# Altium PCB captivate_pgmr.PcbDoc (part 2 of 2)
Units mil, origin at the board's own origin, x right, y up, seen from the top; angles counter-clockwise.
Board outline 2200 x 2200 mil, 4 copper layers (Top Layer, Signal Layer 1, Signal Layer 2, Bottom Layer), stack 61.6 mil thick; 159 components, 109 nets, 528 pads, 147 vias.
Unrouted connection lines stored in the file: 5.
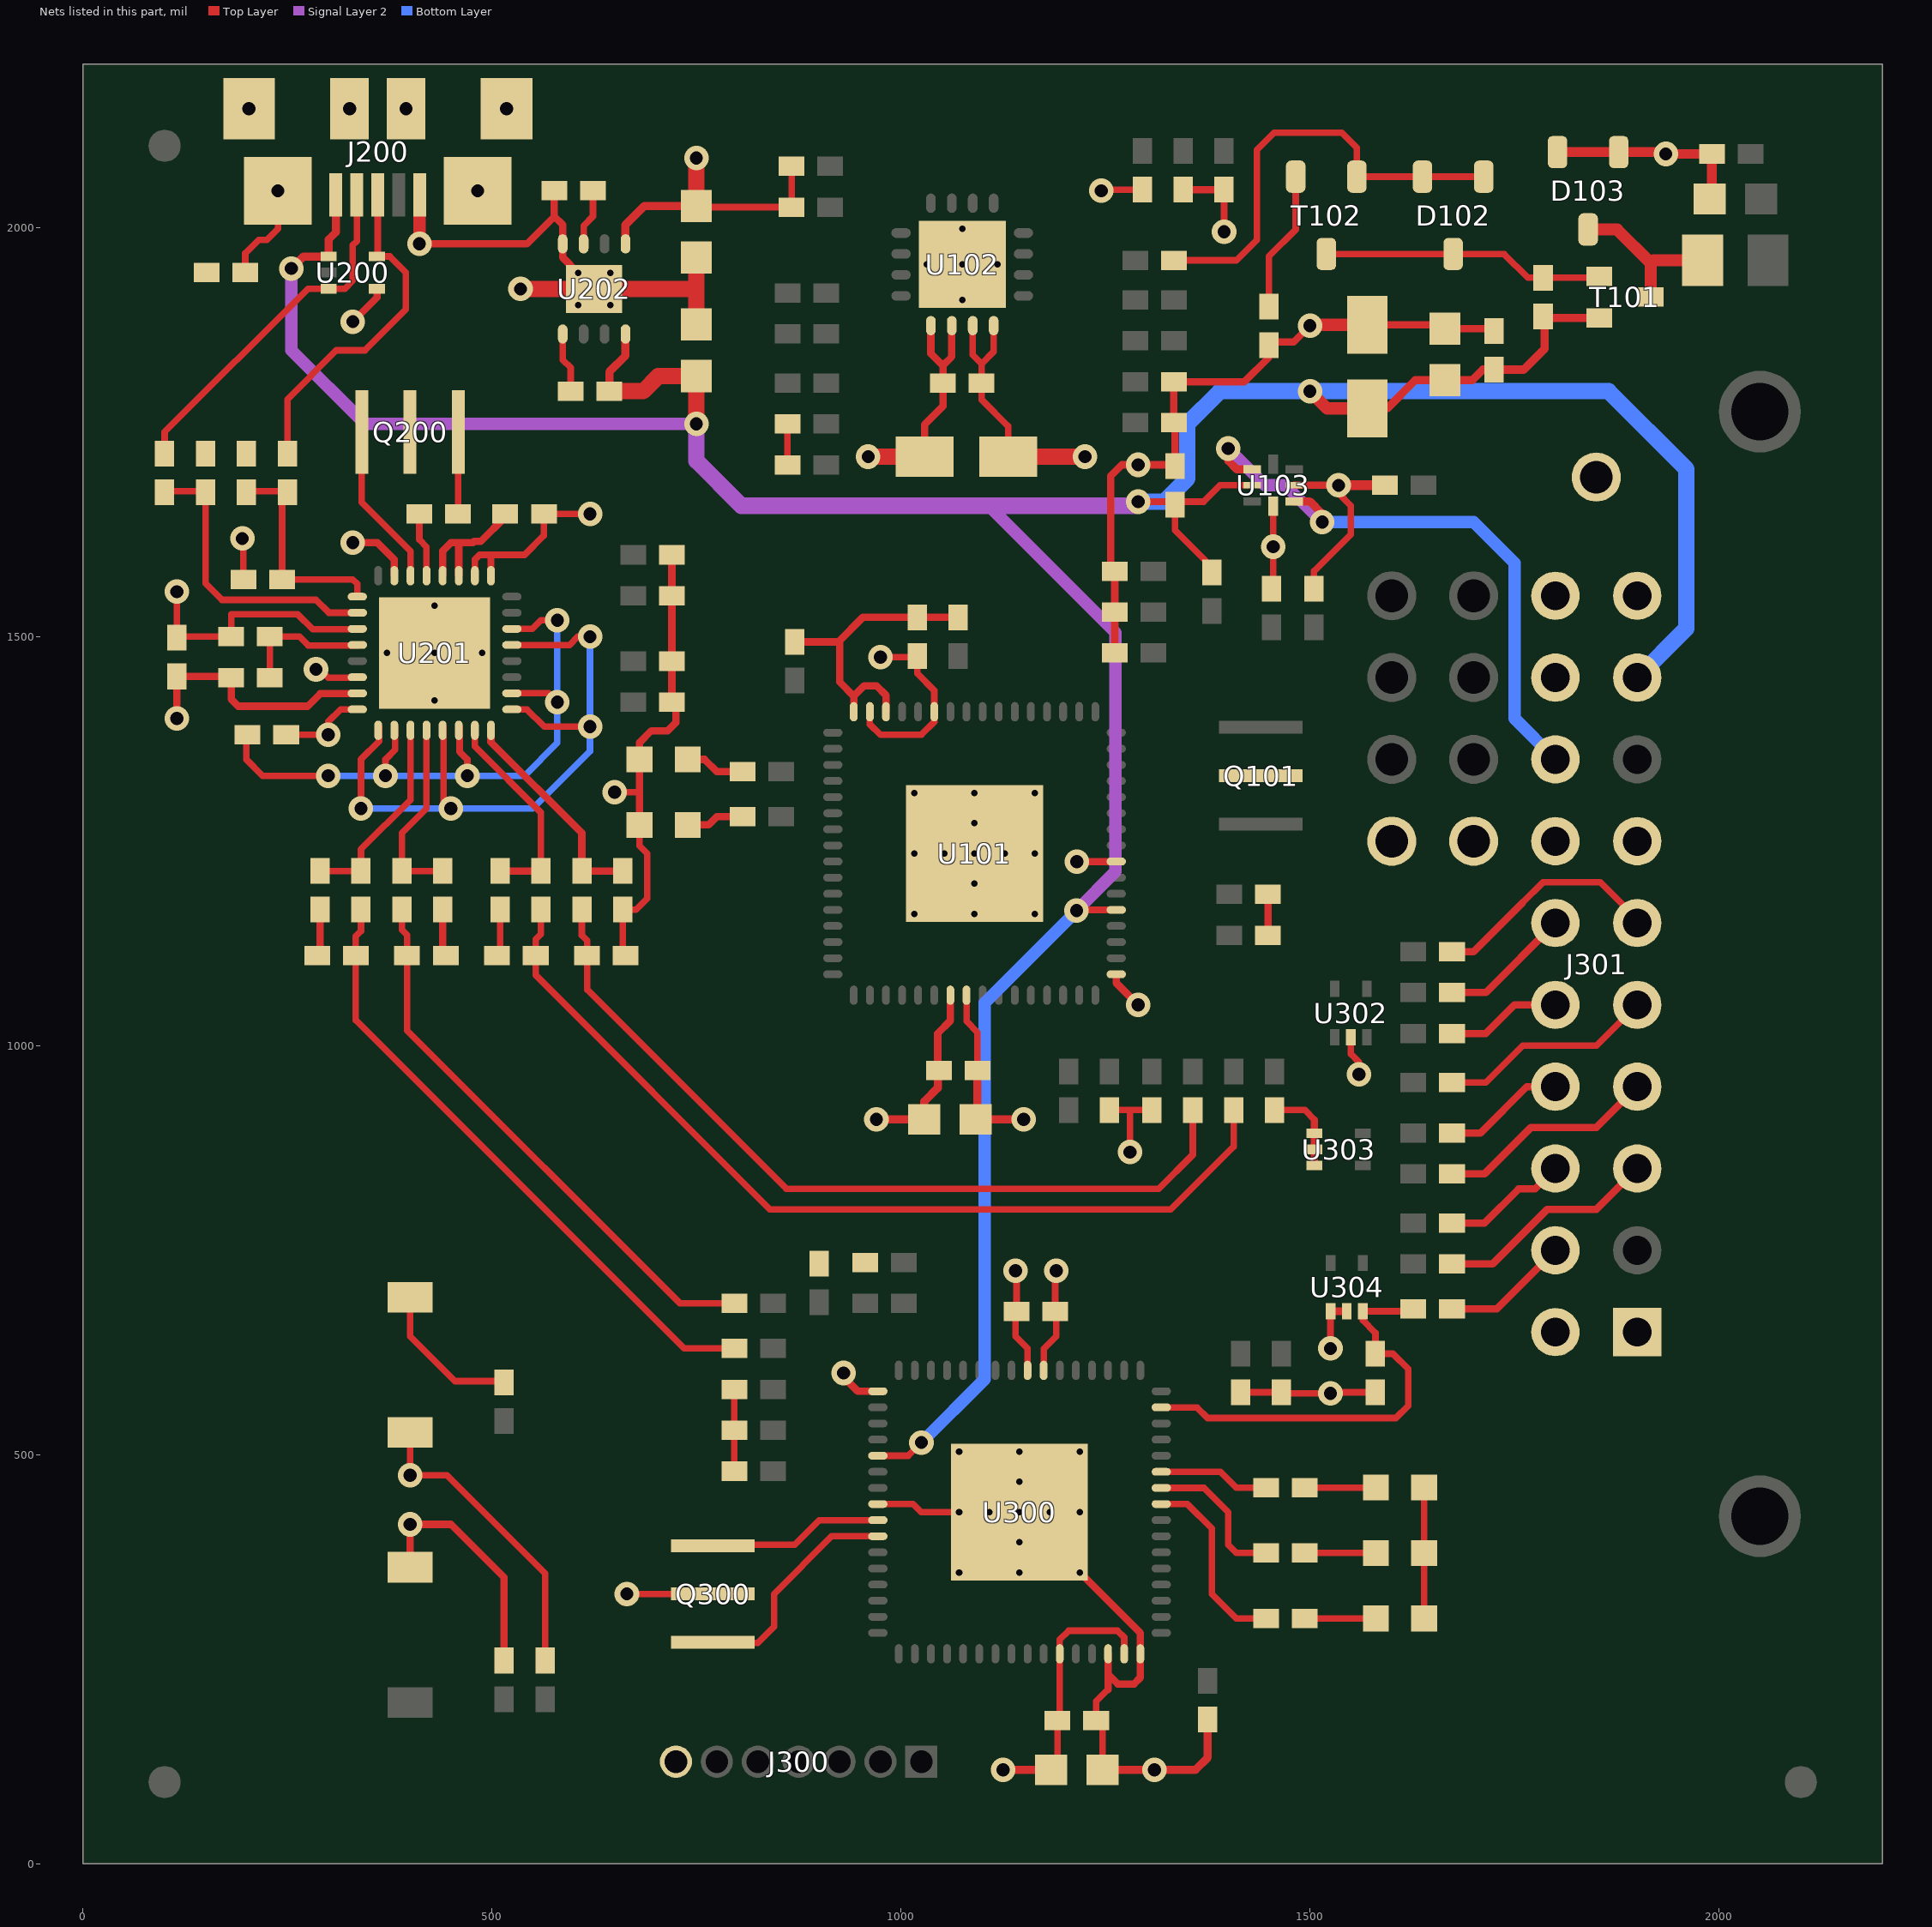
[diagram p4: the nets of this part, all layers, seen from the top]

## Via types
v1: diameter 30, hole 16, Top Layer to Bottom Layer, tented both sides, 107 vias
v2: diameter 19.68, hole 7.87, Top Layer to Bottom Layer, 40 vias

## Nets (pads, with @x,y where several pads share a name; then routed paths per layer and width w, separated by ;. In a path a pad name is that pad's centre, name@x,y a point inside that pad or via, vN(x,y) a via of type N, cw(c..) or ccw(c..) an arc to the next point about the centre after c; other vN are vias at no path point) (continued)
GND: C101.2 C102.2 C103.2 C104.2 C106.2 C107.2 C109.2 C110.2 C111.2 C112.2 C113.2 C115.2 C116.2 C117.2 C118.2 C119.2 C120.2 C121.2 C122.2 C123.2 C124.2 C125.2 C200.2 C201.2 C204.2 C205.2 C206.2 C207.2 C208.2 C209.2 C210.2 C211.2 C212.2 C213.2 C300.2 C303.2 C304.2 C305.2 C306.2 C307.2 C308.2 C309.2 C310.2 D103.1 D103.2 D300.2 D301.2 D302.2 GND.1 J200.5 J300.7 J301.1 J301.2 J301.13 J301.14 J301.19 J301.20 LED101.2 LED102.2 Q101.2 Q200.2 Q300.2 R106.2 R107.1 R108.1 R113.1 R115.1 R119.2 R122.1 R125.1 R200.2 R207.1 R208.1 R212.1 R213.1 R215.1 R217.1 R218.1 R219.1 R307.1 S300.1 TP8.1 U101.14 U101.16 U101.39 U101.49 U101.56 U101.65 U102.13 U102.14 U102.17 U103.6 U200.4 U201.7 U201.27 U201.28 U201.31 U202.4 U202.9 U300.14 U300.16 U300.39 U300.49 U300.56 U300.65 U302.2 U303.1 U303.2 U303.3 U304.1 U304.2 | length 6602
  Top Layer w8: R213.1@506.38,1110 510,1113.62 C207.2@510,1166.38 ; v1(650,1310) 680.47,1310 ; R212.1@663.62,1110 660,1113.62 C206.2@660,1166.38 676.38,1166.38 690,1180 690,1235 680.47,1244.53 LED102.2@680.47,1270 ; v1(665,330) 675,330 715,330 Q300.2@790,330 ; C309.2@796.38,480 C308.2@796.38,530 C304.2@796.38,580 ; C122.2@861.38,1710 R122.1@861.38,1760 ; U300.56@971.77,439.84 1015,439.84 1024.84,430 1025,430 v2(1145,430) ; U300.39@1174.53,603.23 1174.53,629.53 1190,645 1190,673.62 C305.2@1188.62,675 1188.62,723.62 v1(1190,725) ; C306.2@1246.5,115 1246.5,167.13 C307.2@1238.62,175 1238.62,198.62 1253.27,213.27 ; C110.2@1255,921.38 1280,921.38 ; v1(1280,870) 1280,921.38 ; R106.2@1306.79,921.38 1280,921.38 ; v1(1395,1995) C116.2@1395,2046.38 ; C111.2@1456.79,921.38 1493.62,921.38 1505.47,909.53 ; C112.2@1505,1558.62 1505,1580 1550,1625 1550,1660 1535,1675 v1(1535,1685) ; v1(1525,630) 1525,675.15 U304.1@1525.32,675.47 ; U302.2@1550,1010.47 1550,990 1560,980 v1(1560,965) ; D300.2@1639.53,300 D301.2@1639.53,380 D302.2@1639.53,460
  Top Layer w9: v1(115,1400) C209.2@115,1451.38 C208.2@180,1451.38 ; C208.2@181.38,1450 181.38,1423.62 190,1415 275,1415 290.28,1430.28 U201.7@336.61,1430.28 ; R208.1@286.38,1110 290,1113.62 C205.2@290,1166.38 ; v1(330,1615) 360,1615 380.79,1594.21 U201.31@380.79,1574.49 ; v1(330,1885) 359.53,1914.53 U200.4@359.53,1925.31 ; S300.1@400.94,363.62 S300.1@400,362.68 v1(400,415) 450,415 515,350 C300.2@515,248.62 ; v1(411.42,1980.32) 542.76,1980 576.38,2013.62 ; U201.28@439.84,1574.49 439.84,1604.84 450,1615 460,1615 ; C204.2@440,1166.38 440,1113.62 R207.1@443.62,1110 ; U201.27@459.53,1574.49 459.53,1614.53 460,1615 ; C210.2@516.38,1650 516.38,1646.38 486.37,1616.37 478.22,1616.37 476.84,1615 460,1615 ; C211.2@576.38,2045 576.38,2013.62 ; U202.9@625,1925 v2(605.32,1944.69) 586.61,1963.39 586.61,2003.39 576.38,2013.62 ; v1@663.62,328.62 v1(665,330) ; v1@673.62,328.62 v1@675,330 ; LED102.2@680.47,1270 680.47,1310 LED101.2@680.47,1350 680.47,1370.47 695,1385 715,1385 725,1395 725,1415 R215.1@720,1420 R217.1@720,1470 R218.1@720,1550 R219.1@720,1600 ; C101.2@870,1493.62 923.62,1493.62 ; v1(930,600) 930,595 947.33,577.67 U300.49@971.77,577.68 ; U101.16@942.36,1408.23 942.36,1427.36 ; U101.14@981.73,1408.23 981.73,1428.27 970,1440 955,1440 942.36,1427.36 ; C106.2@1028.82,1720 1028.82,1759.09 1051.38,1781.65 C124.2@1051.38,1810 1051.38,1831.38 ; U102.13@1036.61,1880.2 1036.61,1846.14 1051.38,1831.38 ; C103.2@1045,971.38 1045,1015 1060.47,1030.47 U101.39@1060.47,1061.77 ; U102.14@1062.2,1880.2 1062.2,1842.2 1051.38,1831.38 ; C121.2@1070,1523.62 C113.2@1020,1523.62 953.62,1523.62 923.62,1493.62 ; v2(1145,430) 1292.64,282.36 1292.64,227.64 1285,220 1265,220 1255,230 1253.27,230 ; v1(1215,1225) 1215.15,1225.15 U101.56@1263.23,1225.15 ; 1253.27,213.27 1253.27,230 ; U300.14@1253.27,256.77 1253.27,230 ; R125.1@1261.38,1480 C123.2@1261.38,1530 R107.1@1261.38,1580 1256.38,1585 1256.38,1696.38 1270,1710 1333.62,1710 C125.2@1335,1708.62 1335,1760.28 R113.1@1333.62,1761.65 C115.2@1333.62,1811.65 1420,1811.65 1450,1841.65 R119.2@1450,1856.38 1453.62,1860 1480,1860 v1(1500,1880) ; U101.49@1263.23,1087.32 1263.23,1076.77 v1(1290,1050) ; R106.2@1305.41,920 R106.2@1306.79,921.38 ; R115.1@1345,2046.38 C116.2@1395,2046.38 ; C107.2@1448.62,1135 C102.2@1448.62,1185 ; U103.6@1480.59,1685 v1(1535,1685) ; U303.3@1505.47,853.66 U303.2@1505.47,873.35 U303.1@1505.47,893.03 1505.47,909.53 ; U304.1@1525.32,675.47 U304.2@1545.01,675.47 ; C109.2@1570,1881.18 1660.31,1881.18 C117.2@1665,1876.5 1722.13,1876.5 C118.2@1725,1873.62 ; 923.62,1493.62 925,1492.24 925,1444.72 942.36,1427.36
  Top Layer w10: v1(970,910) C104.2@1028.5,910 1028.5,931.85 1045,948.35 C103.2@1045,971.38 ; C306.2@1246.5,115 v1(1310,115) 1360,115 1375,130 C310.2@1375,176.38
  Top Layer w12: v1(1535,1685) R108.1@1591.38,1685 ; D103.2@1802.6,2092.24 D103.1@1877.4,2092.24 1932.76,2092.24 v1(1935,2090) C120.2@1991.38,2090 1991.38,2037.87 C119.2@1988.5,2035
  Top Layer w15: v1@411.73,1980 J200.5@411.73,2044.69 ; v1(1500,1880) 1501.18,1881.18 C109.2@1570,1881.18
  Top Layer w20: v1(535,1925) U202.9@625,1925 750,1925 ; C212.2@750,1881.5 750,1925 ; C213.2@750,1963.5 750,1925 ; v1(960,1720) C106.2@1028.82,1720
  other v1: 1290,1710
  other v2: 1071.18,356.18 1145,356.18 1218.82,356.18 1145,393.09 1071.18,430 1108.09,430 1181.91,430 1218.82,430 1145,466.91 1071.18,503.82 1145,503.82 1218.82,503.82 1016.18,1161.18 1090,1161.18 1163.82,1161.18 1090,1198.09 1016.18,1235 1053.09,1235 1090,1235 1126.91,1235 1163.82,1235 1090,1271.91 1016.18,1308.82 1090,1308.82 1163.82,1308.82 605.32,1905.31 644.68,1905.31 1075,1911.69 644.68,1944.69 1031.69,1955 1075,1955 1118.31,1955 1075,1998.31
HUB_DM1: R204.1 R208.2 R305.1 | length 766.7
  Top Layer w8: R204.1@340,1166.38 340,1140 333.62,1133.62 R208.2@333.62,1110 333.62,1031.38 735,630 R305.1@796.38,630
HUB_DM2: R103.1 R209.1 R213.2 | length 1130.8
  Top Layer w8: R209.1@560,1166.38 560,1136.65 553.62,1130.28 R213.2@553.62,1110 553.62,1086.38 840,800 1330,800 1406.79,876.79 R103.1@1406.79,921.38
HUB_DP1: R205.1 R207.2 R306.1 | length 688.6
  Top Layer w8: R205.1@390,1166.38 390,1141.65 396.38,1135.28 R207.2@396.38,1110 396.38,1018.62 730,685 R306.1@796.38,685
HUB_DP2: R104.1 R211.1 R212.2 | length 1013.6
  Top Layer w8: R211.1@610,1166.38 610,1135 616.38,1128.62 R212.2@616.38,1110 616.38,1068.62 860,825 1315,825 1356.79,866.79 R104.1@1356.79,921.38
LED3: R300.2 U300.25 | length 233.1
  Top Layer w8: U300.25@1318.23,439.84 1349.85,439.84 1350,440 1380,410 1380,330 1410,300 R300.2@1446.38,300
LED4: R301.2 U300.26 | length 184.5
  Top Layer w8: U300.26@1318.23,459.53 1370.47,459.53 1400,430 1400,390 1410,380 R301.2@1446.38,380
LED5: R320.2 U300.27 | length 136.1
  Top Layer w8: U300.27@1318.23,479.22 1390.77,479.22 1410,460 R320.2@1446.38,460
MCU_IRQ: R308.1 R319.1 U300.31 U304.3 | length 527.1
  Top Layer w8: U300.31@1318.23,557.99 1362.02,557.99 1375,545 1605,545 1620,560 1620,605 1601.38,623.62 R308.1@1580,623.62 1580,649.21 1564.69,664.52 U304.3@1564.69,675.47 1623.5,675.47 R319.1@1626.38,678.35
NetC200_1: C200.1 R201.1 R202.2 U201.1 | length 270
  Top Layer w8: C200.1@200,1677.62 250,1677.62 243.62,1671.24 R201.1@243.62,1570 330,1570 335.51,1564.49 U201.1@335.51,1548.9
NetC201_1: C201.1 R203.2 U201.2 | length 361.7
  Top Layer w8: R203.2@100,1677.62 C201.1@150,1677.62 ; C201.1@150,1676.38 150,1565 170,1545 285,1545 300.79,1529.21 U201.2@335.51,1529.21
NetC204_1: C204.1 R205.2 U201.12 | length 234.4
  Top Layer w8: U201.12@420.16,1385.51 420.16,1290.16 390,1260 R205.2@390,1213.62 C204.1@440,1213.62
NetC205_1: C205.1 R204.2 U201.11 | length 246.9
  Top Layer w8: C205.1@290,1213.62 R204.2@340,1213.62 340,1240 400.47,1300.47 U201.11@400.47,1385.51
NetC206_1: C206.1 R211.2 U201.16 | length 267.9
  Top Layer w9: U201.16@498.9,1385.51 498.9,1371.1 610,1260 R211.2@610,1213.62 C206.1@660,1213.62
NetC207_1: C207.1 R209.2 U201.15 | length 255.4
  Top Layer w8: U201.15@479.21,1385.51 479.21,1365.79 560,1285 R209.2@560,1213.62
  Top Layer w9: C207.1@510,1213.62 R209.2@560,1213.62
NetC208_1: C208.1 R214.1 U201.4 | length 162.4
  Top Layer w8: C208.1@228.62,1450 R214.1@228.62,1500 265,1500 275.67,1489.33 U201.4@336.61,1489.33
NetC211_1: C211.1 U202.3 | length 69.6
  Top Layer w8: U202.3@612.2,1980.12 612.2,2002.2 623.62,2013.62 C211.1@623.62,2045
NetD102_1: D102.1 D102.2 R118.1 T102.1 | length 550.8
  Top Layer w8: R118.1@1333.62,1960 1410,1960 1435,1985 1435,2095 1456,2116 1539,2116 1557.4,2097.6 T102.1@1557.4,2062.24 D102.2@1637.6,2062.24 D102.1@1712.4,2062.24
NetD102_3: D102.3 R120.2 T101.1 T102.3 | length 343.6
  Top Layer w8: T102.3@1520,1967.76 1737.24,1967.76 1766.38,1938.62 R120.2@1785,1938.62 T101.1@1851.54,1938.62
NetD103_3: D103.3 L101.1 T101.3 | length 200
  Top Layer w15: D103.3@1840,1997.76 1875.24,1997.76 1916.5,1956.5 ; T101.3@1916.5,1915 1916.5,1956.5 ; L101.1@1980,1960 1920,1960 1916.5,1956.5
NetD300_1: D300.1 R300.1 | length 81.8
  Top Layer w8: R300.1@1498.63,300 D300.1@1580.48,300
NetD301_1: D301.1 R301.1 | length 86.9
  Top Layer w8: R301.1@1493.62,380 D301.1@1580.48,380
NetD302_1: D302.1 R320.1 | length 86.9
  Top Layer w8: R320.1@1493.63,460 D302.1@1580.48,460
NetJ200_2: J200.2 R203.1 U200.3 | length 444.7
  Top Layer w8: R203.1@100,1723.62 100,1750 275.31,1925.31 U200.3@300.47,1925.31 320.31,1925.31 330,1935 330,1978.46 334.96,1983.42 J200.2@334.96,2044.69
NetJ200_3: J200.3 R202.1 U200.5 | length 426
  Top Layer w8: R202.1@250,1723.62 250,1790 310,1850 345,1850 395,1900 395,1945 375.32,1964.68 U200.5@359.53,1964.68 360.55,1965.71 J200.3@360.55,2044.69
NetJ301_4: J301.4 R319.2 | length 156.1
  Top Layer w9: R319.2@1673.62,678.35 1728.35,678.35 J301.4@1800,750
NetJ301_5: J301.5 R317.1 | length 274.7
  Top Layer w9: R317.1@1673.62,733.35 1723.35,733.35 1790,800 1850,800 J301.5@1900,850
NetJ301_6: J301.6 R318.2 | length 159
  Top Layer w9: R318.2@1673.62,783.35 1713.35,783.35 1755,825 1775,825 J301.6@1800,850 J301.6@1805,850
NetJ301_7: J301.7 R316.1 | length 270.6
  Top Layer w9: R316.1@1673.62,843.35 1713.35,843.35 1770,900 1850,900 J301.7@1900,950
NetJ301_8: J301.8 R315.2 | length 149.8
  Top Layer w9: R315.2@1673.62,893.35 1708.35,893.35 1765,950 J301.8@1800,950
NetJ301_9: J301.9 R314.1 | length 265.7
  Top Layer w8: R314.1@1673.62,955 1715,955 1760,1000 1850,1000 J301.9@1900,1050
NetJ301_10: J301.10 R313.2 | length 140.9
  Top Layer w9: R313.2@1673.62,1015 1715,1015 1750,1050 J301.10@1800,1050
NetJ301_11: J301.11 R312.1 | length 285.2
  Top Layer w8: 1760,1175 1785,1200 1855,1200 1900,1155 J301.11@1900,1150
  Top Layer w9: R312.1@1673.62,1115 1700,1115 1760,1175
NetJ301_12: J301.12 R311.2 | length 161.6
  Top Layer w9: R311.2@1673.62,1065 1715,1065 J301.12@1800,1150
NetLED101_1: LED101.1 R101.1 | length 73.1
  Top Layer w9: LED101.1@739.53,1350 760,1350 775,1335 R101.1@806.38,1335
NetLED102_1: LED102.1 R102.1 | length 71
  Top Layer w9: LED102.1@739.53,1270 765,1270 775,1280 R102.1@806.38,1280
NetQ200_1: Q200.1 U201.30 | length 205.2
  Top Layer w8: Q200.1@340.95,1755 340.95,1664.05 400.47,1604.53 U201.30@400.47,1574.49
NetQ200_3: Q200.3 R210.1 | length 105.2
  Top Layer w8: R210.1@458.62,1650 458.62,1754.57 Q200.3@459.06,1755
NetQ300_1: Q300.1 U300.57 | length 194.7
  Top Layer w8: Q300.1@790,389.05 790.95,390 870,390 900.15,420.15 U300.57@971.77,420.16
NetQ300_3: Q300.3 U300.58 | length 279.6
  Top Layer w8: Q300.3@770,270.94 770.94,270 825,270 845,290 845,330 915.46,400.46 U300.58@971.77,400.47
NetR119_1: R119.1 T102.2 | length 172.1
  Top Layer w8: R119.1@1450,1903.62 1450,1965 1482.6,1997.6 T102.2@1482.6,2062.24
NetR210_2: R210.2 U201.29 | length 79.1
  Top Layer w8: R210.2@411.38,1650 411.38,1618.62 420.16,1609.84 U201.29@420.16,1574.49
NetR216_2: R216.2 U202.5 | length 73.9
  Top Layer w8: U202.5@586.61,1869.88 586.61,1838.39 596.38,1828.62 R216.2@596.38,1800
NetR304_2: R304.2 S301.1 | length 186
  Top Layer w8: S301.1@400,692.68 400,645 455,590 513.62,590 R304.2@515,588.62
OVRCUR: R206.2 U201.10 U201.14 U201.18 U201.22 | length 818.8
  Top Layer w8: R206.2@201.38,1380 200,1378.62 200,1350 220,1330 v1(300,1330) ; v1(370,1330) 370,1350 381.89,1361.89 U201.10@381.89,1390 ; U201.14@460.63,1390 460.63,1359.37 470,1350 v1(470,1330) ; U201.18@524.49,1430.79 569.21,1430.79 ; U201.22@524.49,1509.53 549.53,1509.53 560,1520 v1(580,1520)
  Bottom Layer w8: v1(300,1330) v1(370,1330) v1(470,1330) 540,1330 580,1370 v1(580,1520)
  other v1: 580,1420
POWERON: U201.9 U201.13 U201.17 U201.21 | length 860.9
  Top Layer w8: v1(340,1290) 340,1350 362.2,1372.2 U201.9@362.2,1390 ; U201.13@440.94,1390 440.94,1299.06 v1(450,1290) ; U201.17@524.49,1411.1 542.85,1411.1 563.95,1390 v1(620,1390) ; U201.21@524.49,1489.84 594.84,1489.84 v1@605,1500
  Bottom Layer w8: v1@330,1290 v1(340,1290) v1(450,1290) 550,1290 620,1360 v1(620,1390) v1(620,1500)
THERMAL: U201.33
  other v2: 430,1421.93 371.93,1480 430,1480 488.07,1480 430,1538.07
USB_SHIELD: J200.6 J200.7 J200.8 J200.9 J200.10 J200.11 R200.1 | length 164.7
  Top Layer w8: R200.1@198.62,1945 198.62,1968.62 215,1985 225,1985 238.5,1998.5 v1(238.5,2044.92) ; J200.11@201.82,2028.64 201.82,2031.97 220.86,2031.97 J200.11@235,2046.1
  other v1: 482.6,2044.92 203.07,2145.31 326.1,2145.31 395,2145.31 518.03,2145.31
VCC_5V: C109.1 C117.1 C118.1 C125.1 C212.1 J200.1 J301.17 R120.1 R124.2 R216.1 T101.2 U101.53 U103.2 U200.1 U202.8 U300.53 | length 4809.5
  Top Layer w8: U300.53@971.77,498.91 1008.91,498.91 v1(1025,515) ; v1(1214.68,1165.32) 1215.45,1166.08 U101.53@1263.23,1166.09 ; v1(1290,1665) 1331.38,1665 C125.1@1335,1661.38 ; R124.2@1380,1578.62 1380,1585 1335,1630 C125.1@1335,1661.38 ; U103.2@1429.41,1685 1390,1685 1370,1665 1338.62,1665 C125.1@1335,1661.38
  Top Layer w10: v1(255,1950) 269.68,1964.68 U200.1@300.47,1964.68 300.47,1985.47 309.37,1994.37 J200.1@309.37,2044.69 ; R216.1@643.62,1800 643.62,1823.62 663.39,1843.39 U202.8@663.39,1869.88 ; C109.1@1570,1778.82 1594.09,1778.82 1628.78,1813.5 C117.1@1665,1813.5 1698.5,1813.5 1711.38,1826.38 1761.38,1826.38 1786.97,1851.97 1786.97,1889.41 T101.2@1853.5,1889.41
  Top Layer w15: v1(1500,1800) 1521.18,1778.82 C109.1@1570,1778.82
  Top Layer w20: R216.1@643.62,1800 685,1800 703.5,1818.5 C212.1@750,1818.5 v1(750,1760)
  Signal Layer 2 w15: v1(255,1950) 255,1850 345,1760 v1(750,1760) ; 1110,1660 1110,1657.28 1262.28,1505 1262.28,1212.91 v1(1214.68,1165.32)
  Signal Layer 2 w20: v1(750,1760) 750,1715 805,1660 1110,1660 1285,1660 v1(1290,1665)
  Bottom Layer w15: v1(1025,515) 1102.42,592.42 1102.42,1052.42 1214.68,1164.68 v1(1214.68,1165.32)
  Bottom Layer w20: v1(1290,1665) 1321.81,1665 1350,1693.19 1350,1760 1390,1800 v1(1500,1800) 1865,1800 1960,1705 1960,1510 J301.17@1900,1450
VCC_LDO: C103.1 C104.1 C106.1 C113.1 C124.1 C209.1 C210.1 C213.1 C305.1 C306.1 C307.1 J301.18 R109.2 R114.2 R116.2 R117.2 R201.2 R206.1 R214.2 R302.2 R308.2 R309.2 R310.1 S301.2 TP7.1 U101.11 U101.15 U101.40 U102.15 U102.16 U103.4 U201.3 U201.6 U201.8 U201.25 U201.26 U202.1 U300.11 U300.15 U300.40 | length 3028.1
  Top Layer w8: C209.1@115,1498.62 v1(115,1555) ; C209.1@116.38,1500 R214.2@181.38,1500 181.38,1527.5 262.5,1527.5 280.98,1509.02 U201.3@336.61,1509.02 ; v1(195,1620) 196.38,1618.62 R201.2@196.38,1570 ; R206.1@248.62,1380 v1(300,1380) 300,1396.1 315,1411.1 U201.8@335.51,1411.1 ; v1(285,1460) 290,1460 300,1450 335.04,1450 U201.6@335.51,1450.47 ; S301.2@400,527.32 v1(400,475) 445,475 565,355 R302.2@565,248.62 ; U201.26@479.21,1574.49 479.21,1594.21 485,1600 500,1600 ; U201.25@498.9,1574.49 498.9,1598.9 500,1600 ; v1(620,1650) C210.1@563.62,1650 563.62,1623.62 540,1600 500,1600 ; C213.1@750,2026.5 751.5,2025 R116.2@866.38,2025 R117.2@866.38,2075 ; U101.15@962.05,1408.23 962.05,1392.95 975,1380 1025,1380 1040.79,1395.79 1040.79,1434.21 1020,1455 C113.1@1020,1476.38 1018.62,1475 v1(975,1475) ; U101.40@1080.16,1061.77 1080.16,1029.84 1093.62,1016.38 C103.1@1093.62,970 ; U102.15@1087.8,1880.2 1087.8,1844.45 1098.62,1833.62 ; C104.1@1091.5,910 C104.1@1093.62,912.13 ; U102.16@1113.39,1880.2 1113.39,1848.39 1098.62,1833.62 ; C106.1@1131.18,1720 1131.18,1757.16 1098.62,1789.72 C124.1@1098.62,1810 1098.62,1833.62 ; v1(1140,725) 1141.38,723.62 C305.1@1141.38,675 1140,673.62 1140,645 1154.84,630.16 U300.40@1154.84,603.23 ; C306.1@1183.5,115 1191.38,122.87 C307.1@1191.38,175 1194.21,177.83 U300.11@1194.21,256.77 1194.21,274.21 1205,285 1265,285 1272.95,277.05 U300.15@1272.95,256.77 ; v1(1245,2045) 1246.38,2046.38 R114.2@1295,2046.38 ; R309.2@1415,576.38 R310.1@1465,576.38 1466.38,575 v1(1525,575) ; R109.2@1453.21,1558.62 1455,1560.41 v1(1455,1610) U103.4@1455,1659.41 ; v1@1526.38,576.38 R308.2@1580,576.38
  Top Layer w10: U202.1@663.39,1980.12 663.39,2003.39 686.5,2026.5 C213.1@750,2026.5 ; C104.1@1091.5,910 v1(1150,910) ; C104.1@1093.62,912.13 C103.1@1093.62,970 ; v1(1125,115) C306.1@1183.5,115 ; v1(1525,575) v1@1526.38,576.38
  Top Layer w20: C213.1@750,2026.5 v1(750,2085) ; C106.1@1131.18,1720 v1(1225,1720)
VCC_METERED: J301.16 U103.1 U103.5 | length 768.1
  Top Layer w10: v1(1400,1730) 1400,1715 1410.31,1704.69 U103.1@1429.41,1704.69 ; U103.5@1480.59,1665.32 1499.68,1665.32 1515,1650 v1(1515,1640)
  Signal Layer 2 w15: v1(1400,1730) 1445,1685 1470,1685 v1(1515,1640)
  Bottom Layer w15: v1(1515,1640) 1700,1640 1750,1590 1750,1400 J301.16@1800,1350
pads on no net: FID1.1 FID2.1 FID3.1 H1.0 H2.0 H3.0 H4.0 J200.4 J301.3 J301.15 U101.3 U101.4 U101.10 U101.12 U101.13 U101.18 U101.19 U101.22 U101.23 U101.24 U101.25 U101.29 U101.30 U101.31 U101.32 U101.33 U101.36 U101.41 U101.42 U101.45 U101.46 U101.47 U101.48 U200.2 U201.5 U201.32 U202.2 U202.6 U202.7 U300.1 U300.2 U300.3 U300.4 U300.5 U300.6 U300.7 U300.8 U300.9 U300.10 U300.12 U300.13 U300.18 U300.19 U300.20 U300.21 U300.22 U300.23 U300.24 U300.28 U300.29 U300.30 U300.32 U300.33 U300.36 U300.41 U300.42 U300.43 U300.44 U300.45 U300.46 U300.47 U300.48

## Polygon pours and split planes (outlines as drawn)
VCC_LDO on Signal Layer 2 "Signal Layer 1-No Net" (solid, remove dead copper, pour order 6): 0,2200 2200,2200 2200,-50 0,-50 0,2200
GND on Bottom Layer "Bottom Layer-No Net" (solid, remove dead copper, pour order 5): 0,2200 0,0 2200,0 2200,2200 0,2200
GND on Top Layer "Top Layer-No Net" (solid, remove dead copper, pour order 4): 0,2200 2200,2200 2200,0 0,0 0,2200
GND on Signal Layer 1 (split plane): 2179.9,20.1 20.1,20.1 20.1,2179.9 2179.9,2179.9

## Keep-outs
Keep-Out Layer:
  circle w10: c100,2100 r50
  circle w10: c100,100 r50
  lines w10: 0,0 0,2200 2200,2200 2200,0 0,0
  text ".Layer_Name" at -1823,-2758.49 h60

## Other copper
Top Layer:
  rectangle net GND: 1004,1149 1176,1321
  pour cut-out: 960,2030 960,1840 1219.08,1840 1215,1844.08 1215,2030
  pour cut-out: 940,1390 940,1080 1240,1080 1240,1390
  pour cut-out: 990,580 1300,580 1300,280 1297.68,282.32 990,282.32
  text ".Layer_Name" at -1823,-2758.49 h60
Signal Layer 2:
  text ".Layer_Name" at -1823,-2758.49 h60
Bottom Layer:
  text ".Layer_Name" at -1823,-2758.49 h60
Signal Layer 1 (plane layer: these items are gaps in the copper):
  lines w1: 7179.12,-759.68 7278.8,-660 7398.8,-540 7518.8,-420 7638.8,-300 7758.8,-180 7878.8,-60 7998.8,60 8118.8,180 8238.8,300 8298.8,360 ; 7179.12,-699.68 7218.8,-660 7338.8,-540 7458.8,-420 7578.8,-300 7698.8,-180 7818.8,-60 7938.8,60 8058.8,180 8178.8,300 8298.8,420 ; 7179.12,-639.68 7278.8,-540 7398.8,-420 7518.8,-300 7638.8,-180 7758.8,-60 7878.8,60 7998.8,180 8118.8,300 8238.8,420 8298.8,480 ; 7179.12,-579.68 7218.8,-540 7338.8,-420 7458.8,-300 7578.8,-180 7698.8,-60 7818.8,60 7938.8,180 8058.8,300 8178.8,420 8298.8,540 ; 7179.12,-519.68 7278.8,-420 7398.8,-300 7518.8,-180 7638.8,-60 7758.8,60 7878.8,180 7998.8,300 8118.8,420 8238.8,540 ; 7179.12,-459.68 7218.8,-420 7338.8,-300 7458.8,-180 7578.8,-60 7698.8,60 7818.8,180 7938.8,300 8058.8,420 8178.8,540 ; 7179.12,-399.68 7278.8,-300 7398.8,-180 7518.8,-60 7638.8,60 7758.8,180 7878.8,300 7998.8,420 8118.8,540 ; 7179.12,-339.68 7218.8,-300 7338.8,-180 7458.8,-60 7578.8,60 7698.8,180 7818.8,300 7938.8,420 8058.8,540 ; 7179.12,-279.68 7278.8,-180 7398.8,-60 7518.8,60 7638.8,180 7758.8,300 7878.8,420 7998.8,540 ; 7179.12,-219.68 7218.8,-180 7338.8,-60 7458.8,60 7578.8,180 7698.8,300 7818.8,420 7938.8,540 ; 7179.12,-159.68 7278.8,-60 7398.8,60 7518.8,180 7638.8,300 7758.8,420 7878.8,540 ; 7179.12,-99.68 7218.8,-60 7338.8,60 7458.8,180 7578.8,300 7698.8,420 7818.8,540 ; 7179.12,-39.68 7278.8,60 7398.8,180 7518.8,300 7638.8,420 7758.8,540 ; 7179.12,20.32 7218.8,60 7338.8,180 7458.8,300 7578.8,420 7698.8,540 ; 7179.12,80.32 7278.8,180 7398.8,300 7518.8,420 7638.8,540 ; 7179.12,140.32 7218.8,180 7338.8,300 7458.8,420 7578.8,540 ; 7179.12,200.32 7278.8,300 7398.8,420 7518.8,540 ; 7179.12,260.32 7218.8,300 7338.8,420 7458.8,540 ; 7179.12,320.32 7278.8,420 7398.8,540 ; 7179.12,380.32 7218.8,420 7338.8,540 ; 7179.12,440.32 7278.8,540 ; 7179.12,500.32 7218.8,540 ; 7218.8,-780 7338.8,-660 7458.8,-540 7578.8,-420 7698.8,-300 7818.8,-180 7938.8,-60 8058.8,60 8178.8,180 8298.8,300 ; 7278.8,-780 7398.8,-660 7518.8,-540 7638.8,-420 7758.8,-300 7878.8,-180 7998.8,-60 8118.8,60 8238.8,180 8298.8,240 ; 7338.8,-780 7458.8,-660 7578.8,-540 7698.8,-420 7818.8,-300 7938.8,-180 8058.8,-60 8178.8,60 8298.8,180 ; 7398.8,-780 7518.8,-660 7638.8,-540 7758.8,-420 7878.8,-300 7998.8,-180 8118.8,-60 8238.8,60 8298.8,120 ; 7458.8,-780 7578.8,-660 7698.8,-540 7818.8,-420 7938.8,-300 8058.8,-180 8178.8,-60 8298.8,60 ; 7518.8,-780 7638.8,-660 7758.8,-540 7878.8,-420 7998.8,-300 8118.8,-180 8238.8,-60 8298.8,0 ; 7578.8,-780 7698.8,-660 7818.8,-540 7938.8,-420 8058.8,-300 8178.8,-180 8298.8,-60 ; 7638.8,-780 7758.8,-660 7878.8,-540 7998.8,-420 8118.8,-300 8238.8,-180 8298.8,-120 ; 7698.8,-780 7818.8,-660 7938.8,-540 8058.8,-420 8178.8,-300 8298.8,-180 ; 7758.8,-780 7878.8,-660 7998.8,-540 8118.8,-420 8238.8,-300 8298.8,-240 ; 7818.8,-780 7938.8,-660 8058.8,-540 8178.8,-420 8298.8,-300 ; 7878.8,-780 7998.8,-660 8118.8,-540 8238.8,-420 8298.8,-360 ; 7938.8,-780 8058.8,-660 8178.8,-540 8298.8,-420 ; 7998.8,-780 8118.8,-660 8238.8,-540 8298.8,-480 ; 8058.8,-780 8178.8,-660 8298.8,-540 ; 8118.8,-780 8238.8,-660 8298.8,-600 ; 8178.8,-780 8298.8,-660 ; 8238.8,-780 8298.8,-720
  lines w15: 3750,-660 4159.91,-660 5099.65,-660 5959.42,-660 6609.26,-660 7179.12,-660 8298.8,-660 ; 3750,-540 4159.91,-540 5099.65,-540 5959.42,-540 6609.26,-540 7179.12,-540 8298.8,-540 ; 3750,-420 4159.91,-420 5099.65,-420 5959.42,-420 6609.26,-420 7179.12,-420 8298.8,-420 ; 3750,-300 4159.91,-300 5099.65,-300 5959.42,-300 6609.26,-300 7179.12,-300 8298.8,-300 ; 3750,-180 4159.91,-180 5099.65,-180 5959.42,-180 6609.26,-180 7179.12,-180 8298.8,-180 ; 3750,-60 4159.91,-60 5099.65,-60 5959.42,-60 6609.26,-60 7179.12,-60 8298.8,-60 ; 3750,60 4159.91,60 5099.65,60 5959.42,60 6609.26,60 7179.12,60 8298.8,60 ; 3750,180 4159.91,180 5099.65,180 5959.42,180 6609.26,180 7179.12,180 8298.8,180 ; 3750,300 4159.91,300 5099.65,300 5959.42,300 6609.26,300 7179.12,300 8298.8,300 ; 3750,420 4159.91,420 5099.65,420 5959.42,420 6609.26,420 7179.12,420 8298.8,420 ; 3750,540 8298.8,540 ; 4159.91,660 4159.91,-780 ; 5099.65,660 5099.65,-780 ; 5959.42,660 5959.42,-780 ; 6609.26,660 6609.26,-780 ; 7179.12,660 7179.12,-780 ; 4159.91,-780 3750,-780 3750,660 8298.8,660 8298.8,-780 7179.12,-780 ; 4159.91,-780 5099.65,-780 ; 5099.65,-780 5959.42,-780 ; 5959.42,-780 6609.26,-780 ; 6609.26,-780 7179.12,-780
  text "Layer" at 3810,570 h60
  text "Name" at 4219.91,570 h60
  text "Material" at 5159.65,570 h60
  text "Thickness" at 6019.42,570 h60
  text "Constant" at 6669.26,570 h60
  text "Board Layer Stack" at 7239.12,570 h60
  text "1" at 3810,450 h60
  text "Top Overlay" at 4219.91,450 h60
  text "2" at 3810,330 h60
  text "Top Solder" at 4219.91,330 h60
  text "Solder Resist" at 5159.65,330 h60
  text "0.40mil" at 6019.42,330 h60
  text "3.5" at 6669.26,330 h60
  text "3" at 3810,210 h60
  text "Top Layer" at 4219.91,210 h60
  text "Copper" at 5159.65,210 h60
  text "1.40mil" at 6019.42,210 h60
  text "4" at 3810,90 h60
  text "Dielectric1" at 4219.91,90 h60
  text "8.00mil" at 6019.42,90 h60
  text "4.2" at 6669.26,90 h60
  text "5" at 3810,-30 h60
  text "Signal Layer 1" at 4219.91,-30 h60
  text "Copper" at 5159.65,-30 h60
  text "1.40mil" at 6019.42,-30 h60
  text "6" at 3810,-150 h60
  text "Dielectric 2" at 4219.91,-150 h60
  text "FR-4" at 5159.65,-150 h60
  text "40.00mil" at 6019.42,-150 h60
  text "4.2" at 6669.26,-150 h60
  text "7" at 3810,-270 h60
  text "Signal Layer 2" at 4219.91,-270 h60
  text "Copper" at 5159.65,-270 h60
  text "1.40mil" at 6019.42,-270 h60
  text "8" at 3810,-390 h60
  text "Dielectric 3" at 4219.91,-390 h60
  text "8.00mil" at 6019.42,-390 h60
  text "4.2" at 6669.26,-390 h60
  text "9" at 3810,-510 h60
  text "Bottom Layer" at 4219.91,-510 h60
  text "Copper" at 5159.65,-510 h60
  text "1.40mil" at 6019.42,-510 h60
  text "10" at 3810,-630 h60
  text "Bottom Solder" at 4219.91,-630 h60
  text "Solder Resist" at 5159.65,-630 h60
  text "0.40mil" at 6019.42,-630 h60
  text "3.5" at 6669.26,-630 h60
  text "11" at 3810,-750 h60
  text "Bottom Overlay" at 4219.91,-750 h60
  text ".Layer_Name" at -1823,-2758.49 h60

## Silkscreen, mask and mechanical layers (free items; w line width, h text height)
Top Overlay:
  circle w15: c1237,1438 r5
  circle w15: c995,215 r5
  circle w15: c300,1555 r5
  circle w15: c669.94,2014.94 r5
  circle w15: c1195,1915 r5
  circle w10: c1385,1705 r5
  lines w10: 1750,1205 1750,1590 ; 1025,51.25 1030,41.25 ; 1025,51.25 1030,41.25 ; 1025,51.25 1015,41.25 1030,41.25 ; 1590,1620 1605,1620 1595,1610 ; 1590,1620 1595,1610 ; 1590,1620 1595,1610 ; 1005,36.25 1045,36.25 1025,61.25 1005,36.25 ; 1575,1625 1615,1625 1595,1600 1575,1625
  text "TM" at 1920,2155 h20
  text "ENERGY TRACE" at 1438.3,2121.37 h40
  text "JTAG" at 1650,1610 h30
  text "eZ-FET" at 840,1595 h40
  text "USB HUB" at 350,1280 h40
  text "TM" at 640,990 h50
  text "MSP CapTIvate" at 160,960 h75
  text "MCUs" at 740,960 h75
  text "MSP430 Programmer / HID comm" at 90,890 h65
  text "TM" at 660,840 h45
  text "eZ-FET w/Energy Trace     Technology" at 40,820 h65
  text "HID BRIDGE" at 1060,745 h40
  text "BRIDGE" at 97.49,645 h35
  text "BSL" at 152.48,588.63 h35
  text "ENABLE" at 100,535 h35
  text "LED5" at 1710,440 h30
  text "LED4" at 1710,360 h30
  text "BRIDGE" at 107.49,285 h35
  text "LED3" at 1710,280 h30
  text "RESET" at 107.49,230 h35
  text "COMM STATUS" at 1505,200 h30
  text ".Layer_Name" at -1823,-2758.49 h35
Bottom Overlay:
  text "Capacitive Touch MCU Development Board" at 816.93,1702.15 h70 r90
  text "MSP CapTIvate    MCUs" at 740,1543.29 h90 r90
  text ".PRJ_Number" at 2100,1456 h35 r90
  text "www.ti.com/captivate" at 885,1391.28 h70 r90
  text "TM" at 710,970 h50 r90
  text "Rev" at 2100,910 h35 r90
  text ".PCB_Rev" at 2100,780 h35 r90
  text ".Layer_Name" at -1823,-2758.49 h60
Top Paste:
  text ".Layer_Name" at -1823,-2758.49 h60
Bottom Paste:
  text ".Layer_Name" at -1823,-2758.49 h60
Top Solder:
  text ".Layer_Name" at -1823,-2758.49 h60
  text ".Layer_Name" at -1823,-2758.49 h60
Bottom Solder:
  text ".Layer_Name" at -1823,-2758.49 h60
Drill Guide:
  text ".Layer_Name" at -1823,-2758.49 h60
M1 Board Outline:
  the board outline again, w10
  text ".Layer_Name" at -1823,-2758.49 h60
M2 Board Dimensions:
  rectangle: -2400,-2175 -2275,-2050
  rectangle: -2275,-2300 -1900,-2175
  lines w7: -2400,-2175 -1400,-2175 ; -2275,-2300 -2275,-2050 ; -2150,-2300 -2150,-2050 ; -1900,-2300 -1900,-2050 ; -1650,-2300 -1650,-2050 ; -2400,-2300 -1400,-2300 -1400,-2050 -2400,-2050 -2400,-2300
  text ".Layer_Name" at -1823,-2758.49 h60
M3 3D STEP Top:
  text ".Layer_Name" at -1823,-2758.49 h60
M4 3D STEP Bottom:
  text ".Layer_Name" at -1823,-2758.49 h60
M5 Assembly Top:
  lines w10: -2692,-2830.17 3908,-2830.17 ; -2692,-2626.83 3910,-2626.83 ; -2692,-2423.5 -2692,-3033.5 1313,-3033.5 3910,-3033.5 3910,-2423.5 -2691.5,-2423.5 -2691.5,-3033.5 -1116,-3033.5 ; -227,-3033.5 -227,-2423.5 ; 1040,-2626.83 1040,-2423.5 ; 1880,-2626.83 1880,-2423.5 ; 2502,-3040 2502,-2837.17
  text "COMPONENTS MARKED 'DNP' SHOULD NOT BE POPULATED." at -1246.5,-2218.5 h60
  text "ASSEMBLY VARIANT:" at -1247,-2334 h60
  text ".VariantName" at -211,-2334 h60
  text "PCB VIEWED FROM TOP SIDE" at -2628.5,-2555.67 h60
  text "BOARD #:" at -152,-2555.67 h60
  text ".PRJ_Number" at 393.5,-2555.67 h60
  text "REV:" at 1238,-2555.67 h60
  text ".PCB_Rev" at 1529.5,-2555.67 h60
  text "SVN REV:" at 2076,-2555.67 h60
  text ".VersionControl_RevNumber" at 2582,-2555.67 h60
  text "PLOT NAME =" at -2628.5,-2964.34 h60
  text ".plot_File_Name" at -1823,-2964.34 h60
  text "GENERATED    :" at -150,-2964.34 h60
  text ".Print_Date" at 719.5,-2964.34 h60
  text ".Print_Time" at 1448.5,-2964.34 h60
  text "TEXAS INSTRUMENTS" at 2713,-2964.34 h60
M6 Assembly Bottom:
  lines w10: -2692.5,-2627.33 3909.5,-2627.33 ; -2690.5,-2830.67 3909.5,-2830.67 ; -1284.5,-3040.5 -1284.5,-2837.67 ; -662.5,-2627.33 -662.5,-2424 ; 177.5,-2627.33 177.5,-2424 ; 1444.5,-3034 1444.5,-2424 ; 2333.5,-3034 3909,-3034 3909,-2424 -2692.5,-2424 -2692.5,-3034 -95.5,-3034 3909.5,-3034 3909.5,-2424
  text "COMPONENTS MARKED 'DNP' SHOULD NOT BE POPULATED." at 3702,-2218 h60
  text ".VariantName" at 2658,-2334 h60
  text "ASSEMBLY VARIANT:" at 3697,-2334 h60
  text ".VersionControl_RevNumber" at -1364.5,-2556.17 h60
  text "SVN REV:" at -858.5,-2556.17 h60
  text ".PCB_Rev" at -312,-2556.17 h60
  text "REV:" at -20.5,-2556.17 h60
  text ".PRJ_Number" at 824,-2556.17 h60
  text "BOARD #:" at 1369.5,-2556.17 h60
  text "PCB VIEWED FROM BOTTOM SIDE" at 3846,-2556.17 h60
  text "TEXAS INSTRUMENTS" at -1495.5,-2964.84 h60
  text ".Print_Time" at -231,-2964.84 h60
  text ".Print_Date" at 498,-2964.84 h60
  text "GENERATED    :" at 1367.5,-2964.84 h60
  text ".plot_File_Name" at 3040.5,-2964.84 h60
  text "PLOT NAME =" at 3846,-2964.84 h60
M9 Title Sheet:
  drawing of 57 lines, arcs and shapes, not listed
  text "1" at -1660.16,6136.5 h70
  text "2" at 835.5,6136.5 h70
  text "3" at 3324.84,6136.5 h70
  text "4" at 5831.51,6136.5 h70
  text "5" at 8330.5,6136.5 h70
  text "6" at 10835.5,6136.5 h70
  text "A" at -2816.5,4993.5 h70
  text "A" at 11983.5,4993.5 h70
  text "B" at -2816.5,2613.5 h70
  text "B" at 11983.5,2613.5 h70
  text "C" at -2816.5,238.5 h70
  text "C" at 11983.5,238.5 h70
  text "PROJECT TITLE:" at 8943.5,-1622.5 h45
  text ".PRJ_Title" at 8993.5,-1755.83 h70
  text "DESIGNED FOR:" at 8943.5,-1923.5 h45
  text ".PRJ_Customer" at 8993.5,-2063.5 h70
  text "D" at -2816.5,-2131.5 h70
  text "D" at 11983.5,-2131.5 h70
  text "FILE NAME:" at 8943.5,-2223.5 h45
  text ".PCB_File_Name_No_Path" at 8993.5,-2343.5 h70
  text "Texas Instruments (TI) and/or its licensors do not warrant the accuracy or completeness of this specification" at 3974,-2505.34 h45
  text "ENGINEER:" at 8943.5,-2513.5 h45
  text "LAYOUT BY:" at 10448.5,-2513.5 h45
  text "or any information contained therein. TI and/or its licensors do not warrant that this design will meet" at 3929.01,-2618 h45
  text ".PRJ_Engineer" at 8993.5,-2668.49 h70
  text ".PCB_Layout" at 10499,-2668.49 h70
  text "the specifications, will be suitable for your application or fit for any particular purpose, or will operate in" at 3929.01,-2730.67 h45
  text ".Layer_Name" at -1823,-2758.49 h60
  text "ALTIUM DESIGNER VERSION:" at 10448.5,-2823.5 h45
  text "an implementation. TI and/or its licensors do not warrant that the design is production worthy. You should" at 3929.01,-2843.33 h45
  text "completely validate and test your design implementation to confirm the system functionality for your application." at 3974,-2956 h45
  text ".print_Scale" at 8993.5,-2956.83 h70
  text ".Application_BuildNumber" at 10499,-2956.83 h70
  text "1" at -1660.16,-3163.5 h70
  text "2" at 835.5,-3163.5 h70
  text "3" at 3324.84,-3163.5 h70
  text "4" at 5831.51,-3163.5 h70
  text "5" at 8330.5,-3163.5 h70
  text "6" at 10835.5,-3163.5 h70
M10 Fab Notes:
  drawing of 185 lines, arcs and shapes, not listed
  text "DESIGN INFORMATION" at 9981.02,4010 h60
  text "MIN. TRACK WIDTH:" at 9336.46,3830 h60
  text "8" at 10432.7,3830 h60
  text "MIL" at 10587.46,3830 h60
  text "MIN. CLEARANCE:" at 9336.46,3698 h60
  text "0.2" at 10372.7,3698 h60
  text "mm" at 10587.46,3698 h60
  text "MIN. VIA PAD SIZE:" at 9336.46,3566 h60
  text "24" at 10402.71,3566 h60
  text "MIL" at 10587.46,3566 h60
  text "0.05mm (2MIL)" at 10031.46,3424.29 h60
  text "MINIMUM ANNULAR RING" at 9007.23,3420 h60
  text "EXTERNAL" at 10739.46,3420 h60
  text "PER" at 9207.23,3302 h60
  text "IPC-D-275 CLASS 2 LEVEL C" at 9427.23,3302 h60
  text "MIL, HOLES" at 10915.46,3189.71 h60
  text "+/-" at 10523,3189 h60
  text "+/-" at 11377,3189 h60
  text "REGISTRATION TOLERANCES:" at 9007.23,3184 h60
  text "METAL" at 10207,3184 h60
  text "5" at 10783.2,3184 h60
  text "3" at 11616.2,3184 h60
  text "MIL" at 11732.46,3184 h60
  text "MATERIAL:" at 8932.46,2974.54 h60
  text "FR-4 High Tg" at 9918.9,2834.21 h60
  text "FR-408" at 9353.46,2825.64 h60
  text "X" at 9765.46,2825.64 h60
  text "OTHER" at 10841.46,2825.64 h60
  text "62 MIL (1.6mm) +/-10%" at 9673.56,2662.92 h60
  text "THICKNESS:" at 9007.23,2658.64 h60
  text "X" at 9545.4,2658.64 h60
  text "OTHER" at 10958.46,2658.64 h60
  text "TOLERANCE:" at 9007.23,2500.64 h60
  text "X" at 9846.53,2500.64 h60
  text "ANSI IPC-6012 TYPE 3 CLASS 2" at 10033.48,2500.64 h60
  text "OTHER +/-" at 10033.46,2344.64 h60
  text "BOW & TWIST:" at 9007.23,2187.64 h60
  text "X" at 9846.53,2187.64 h60
  text "ANSI IPC-6012 TYPE 3 CLASS 2" at 10033.48,2187.64 h60
  text "OTHER +/-" at 10033.46,2029.13 h60
  text "DRILLING:" at 8932.46,1890.64 h60
  text "REFERENCE:" at 9007.23,1773.64 h60
  text "X" at 9655.46,1773.64 h60
  text "AS SHOWN" at 9842.46,1773.64 h60
  text "X" at 10556.46,1773.64 h60
  text "NC_DRILL FILES" at 10693.46,1773.64 h60
  text "PTH MIN COPPER THICKNESS:" at 9007.23,1615.64 h60
  text "X" at 10357.46,1615.64 h60
  text "1MIL" at 10494.46,1615.64 h60
  text "OTHER" at 10991.46,1615.64 h60
  text "BOARD FINISH:" at 8932.46,1456.64 h60
  text "SILKSCREEN:" at 9087.68,1338.64 h60
  text "X" at 10036.46,1338.64 h60
  text "TOP" at 10162.46,1338.64 h60
  text "X" at 10546.46,1338.64 h60
  text "BOTTOM" at 10673.46,1338.64 h60
  text "SILKSCREEN COLOR:" at 9087.68,1171.64 h60
  text "X" at 10035.42,1171.64 h60
  text "WHITE" at 10162.46,1171.64 h60
  text "OTHER" at 10673.46,1171.64 h60
  text "SOLDER RESIST COLOR:" at 9087.68,1001.64 h60
  text "GREEN" at 9782.46,842.44 h60
  text "BLUE" at 10373.46,842.44 h60
  text "OTHER" at 10911.46,842.44 h60
  text "X" at 10760,840 h60
  text "BLACK" at 11230,835 h200
  text "IMMERSION GOLD (ENIG)" at 9993.46,653.92 h60
  text "ENEPIG" at 11331,650.64 h60
  text "SURFACE FINISH:" at 8932.46,649.64 h60
  text "X" at 9806.51,649.64 h60
  text "IMM. TIN/SILVER OR EQUIV" at 9262,492.64 h60
  text "OTHER" at 10693.46,492.64 h60
  text "ARRAY/PANEL:" at 8932.46,313.64 h60
  text "CUT AND TRIM PER MECH LAYER 1" at 9993.46,309.35 h60
  text "N.C. ROUTE" at 9993.46,157.64 h60
  text "X" at 10672.46,157.64 h60
  text "V. SCORE" at 10859.46,157.64 h60
  text "CERTIFICATION:" at 8932.46,20.64 h60
  text "MATERIALS AND WORKMANSHIP FOR ALL PCBS" at 9657.46,20.64 h60
  text "TO MEET OR EXCEED THE REQUIREMENTS OF:" at 9657.46,-77.36 h60
  text "X" at 9283.96,-213.87 h60
  text "ANSI IPC-A-600F CLASS ->" at 9422.96,-213.87 h60
  text "X" at 11062.02,-213.87 h60
  text "2" at 11180.96,-213.86 h60
  text "1" at 10865.96,-215.36 h60
  text "3" at 11534.96,-215.36 h60
  text "X" at 9286.02,-373.36 h60
  text "UL 94V-0" at 9422.96,-373.36 h60
  text "X" at 10098.02,-373.36 h60
  text "RoHS" at 10234.96,-373.36 h60
  text "OTHER" at 10879.36,-373.36 h60
  text "PER ORDER" at 11276.42,-373.36 h60
  text "ADDITIONAL REQUIREMENTS:" at 8932.46,-514.36 h60
  text "MICROSECTION:" at 9007.23,-629.36 h60
  text "YES" at 9912.96,-629.36 h60
  text "REQUIRED" at 10774.46,-785.51 h60
  text "BARE BOARD ELEC. TEST:" at 9007.23,-788.36 h60
  text "NONE" at 10312.96,-788.36 h60
  text "X" at 10647.46,-788.36 h60
  text "PER ORDER" at 11366.46,-788.36 h60
  text "MANUFACTURER'S UL:" at 9007.23,-945.36 h60
  text "RAIL" at 10172.96,-949.65 h60
  text "METAL" at 10664.77,-949.65 h60
  text "X" at 11040,-950 h60
  text "SILK" at 11176.46,-949.65 h60
  text ".Layer_Name" at -1823,-2758.49 h60
M11 Gerber Information:
  lines w10: -2692,-2830.17 3908,-2830.17 ; -2692,-2626.83 3910,-2626.83 ; -2692,-2423.5 -2692,-3033.5 1313,-3033.5 3910,-3033.5 3910,-2423.5 -2691.5,-2423.5 -2691.5,-3033.5 -1116,-3033.5 ; -227,-3033.5 -227,-2423.5 ; 1040,-2626.83 1040,-2423.5 ; 1880,-2626.83 1880,-2423.5 ; 2502,-3040 2502,-2837.17
  text "ALL ARTWORK VIEWED FROM TOP SIDE" at -2628.5,-2555.67 h60
  text "BOARD #:" at -152,-2555.67 h60
  text ".PRJ_Number" at 393.5,-2555.67 h60
  text "REV:" at 1238,-2555.67 h60
  text ".PCB_Rev" at 1529.5,-2555.67 h60
  text "SVN REV:" at 2076,-2555.67 h60
  text ".VersionControl_RevNumber" at 2582,-2555.67 h60
  text "LAYER NAME =" at -2628.5,-2758.49 h60
  text "PLOT NAME =" at -2628.5,-2964.34 h60
  text ".plot_File_Name" at -1823,-2964.34 h60
  text "GENERATED    :" at -150,-2964.34 h60
  text ".Print_Date" at 719.5,-2964.34 h60
  text ".Print_Time" at 1448.5,-2964.34 h60
  text "TEXAS INSTRUMENTS" at 2713,-2964.34 h60
M12 Stackup:
  text ".Layer_Name" at -1823,-2758.49 h60
M13 Component Bodies Top:
  text ".Layer_Name" at -1823,-2758.49 h60
M14 Component Bodies Bottom:
  text ".Layer_Name" at -1823,-2758.49 h60
M15 Courtyards Top:
  text ".Layer_Name" at -1823,-2758.49 h60
M16 Courtyards Bottom:
  text ".Layer_Name" at -1823,-2758.49 h60
Drill Drawing:
  circle w1: c4583.12,-1730 r25
  lines w1: 4558.12,-1905 4608.12,-1905 4608.12,-1855 4558.12,-1855 4558.12,-1905 ; 4558.12,-1555 4608.12,-1555 4583.12,-1605 4558.12,-1555 ; 4558.12,-1442.5 4570.62,-1442.5 4570.62,-1455 4595.62,-1455 4595.62,-1442.5 4608.12,-1442.5 4608.12,-1417.5 4595.62,-1417.5 4595.62,-1405 4570.62,-1405 4570.62,-1417.5 4558.12,-1417.5 4558.12,-1442.5 ; 4558.12,-1305 4583.12,-1292.5 4608.12,-1305 4595.62,-1280 4608.12,-1255 4583.12,-1267.5 4558.12,-1255 4570.62,-1280 4558.12,-1305 ; 4558.12,-1155 4558.12,-1142.5 4570.62,-1130 4558.12,-1117.5 4558.12,-1105 4570.62,-1105 4583.12,-1117.5 4595.62,-1105 4608.12,-1105 4608.12,-1117.5 4595.62,-1130 4608.12,-1142.5 4608.12,-1155 4595.62,-1155 4583.12,-1142.5 4570.62,-1155 4558.12,-1155
  lines w15: 4490,-1950 8368.97,-1950 ; 4490,-1050 8368.97,-1050 ; 5040.88,-2100 5040.88,-900 ; 5738.69,-2100 5738.69,-900 ; 7084.29,-2100 7084.29,-900 ; 7590.17,-2100 7590.17,-900 ; 4490,-2100 8368.97,-2100 8368.97,-900 4490,-900 4490,-2100
  text "Symbol" at 4580,-1005 h72
  text "Hit Count" at 5085.88,-1005 h72
  text "Finished Hole Size" at 5783.69,-1005 h72
  text "Plated" at 7129.29,-1005 h72
  text "Hole Type" at 7635.17,-1005 h72
  text "2" at 5085.88,-1155 h60
  text "70.00mil (1.778mm)" at 5783.69,-1155 h60
  text "PTH" at 7129.29,-1155 h60
  text "Round" at 7635.17,-1155 h60
  text "7" at 5085.88,-1305 h60
  text "27.56mil (0.700mm)" at 5783.69,-1305 h60
  text "PTH" at 7129.29,-1305 h60
  text "Round" at 7635.17,-1305 h60
  text "9" at 5085.88,-1455 h60
  text "40.00mil (1.016mm)" at 5783.69,-1455 h60
  text "PTH" at 7129.29,-1455 h60
  text "Round" at 7635.17,-1455 h60
  text "20" at 5085.88,-1605 h60
  text "35.43mil (0.900mm)" at 5783.69,-1605 h60
  text "PTH" at 7129.29,-1605 h60
  text "Round" at 7635.17,-1605 h60
  text "40" at 5085.88,-1755 h60
  text "7.87mil (0.200mm)" at 5783.69,-1755 h60
  text "PTH" at 7129.29,-1755 h60
  text "Round" at 7635.17,-1755 h60
  text "107" at 5085.88,-1905 h60
  text "16.00mil (0.406mm)" at 5783.69,-1905 h60
  text "PTH" at 7129.29,-1905 h60
  text "Round" at 7635.17,-1905 h60
  text "185 Total" at 5085.88,-2055 h60
  text ".Layer_Name" at -1823,-2758.49 h60

## Dimensions
-2400,-2300 to -1400,-2300 on M2 Board Dimensions
0,0 to 2200,0 on M2 Board Dimensions
0,0 to 0,2200 on M2 Board Dimensions

## Text inside footprints (layer, text, board x,y; h text height)
J200: M1 Board Outline "board edge" at 452.09,2236.85 h19.68 r180
J301: Top Overlay "1" at 1920,570 h50 r90; M5 Assembly Top "PCB edge" at 2200,1750 h20 r90
Logo2: Bottom Overlay "Pb" at 1708.9,2029.6 h60 r90